# Altium PCB 13-UsbToTTL.PcbDoc
Units mm, origin at the board's own origin, x right, y up, seen from the top; angles counter-clockwise.
Board outline 39.8 x 39.8 mm, 2 copper layers (Top Layer, Bottom Layer); 9 components, 16 nets, 57 pads, 16 vias.
Unrouted connection lines stored in the file: 27.
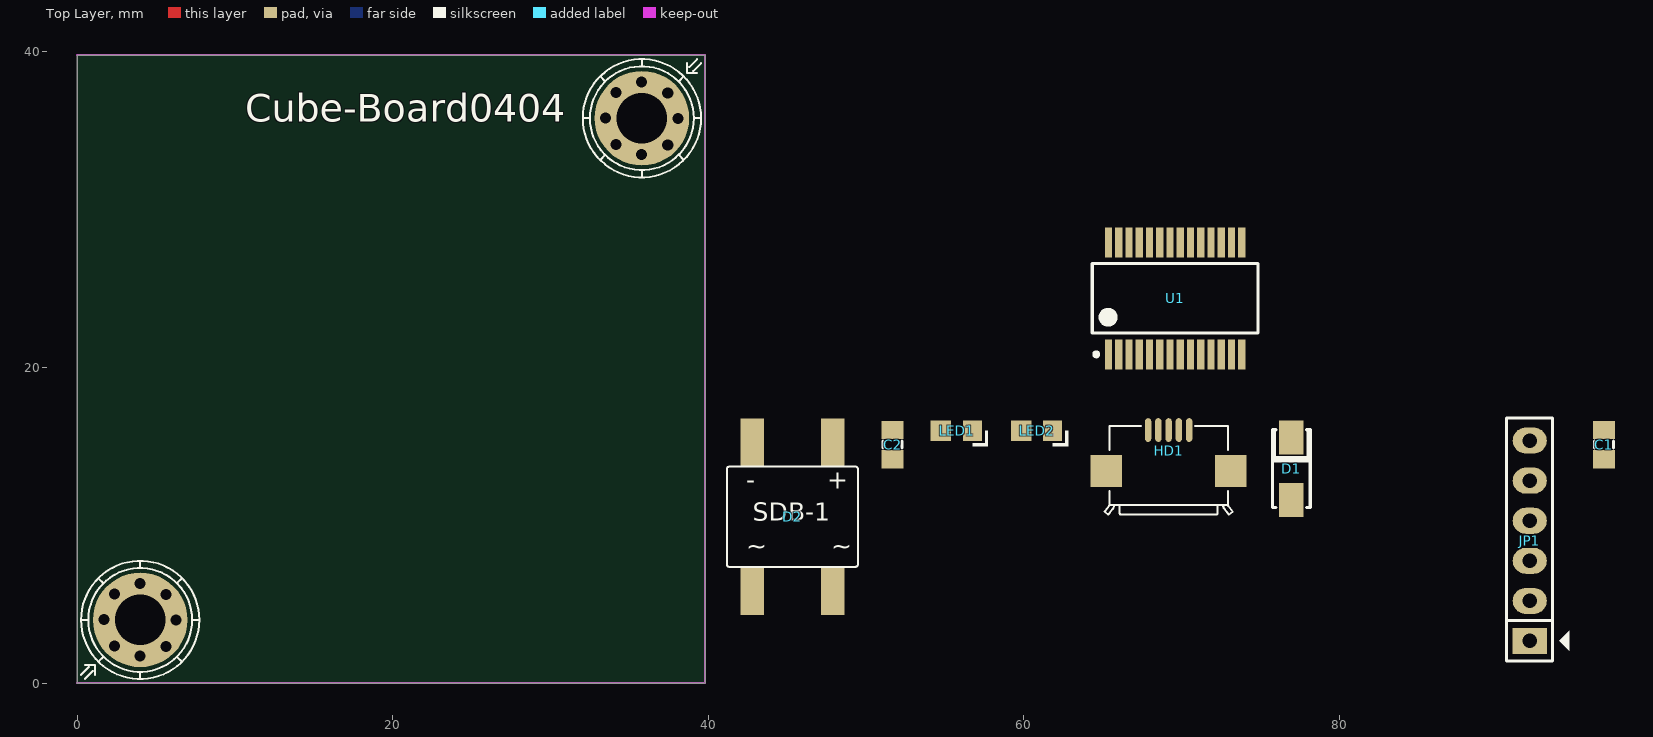
[diagram p0: Top Layer view]
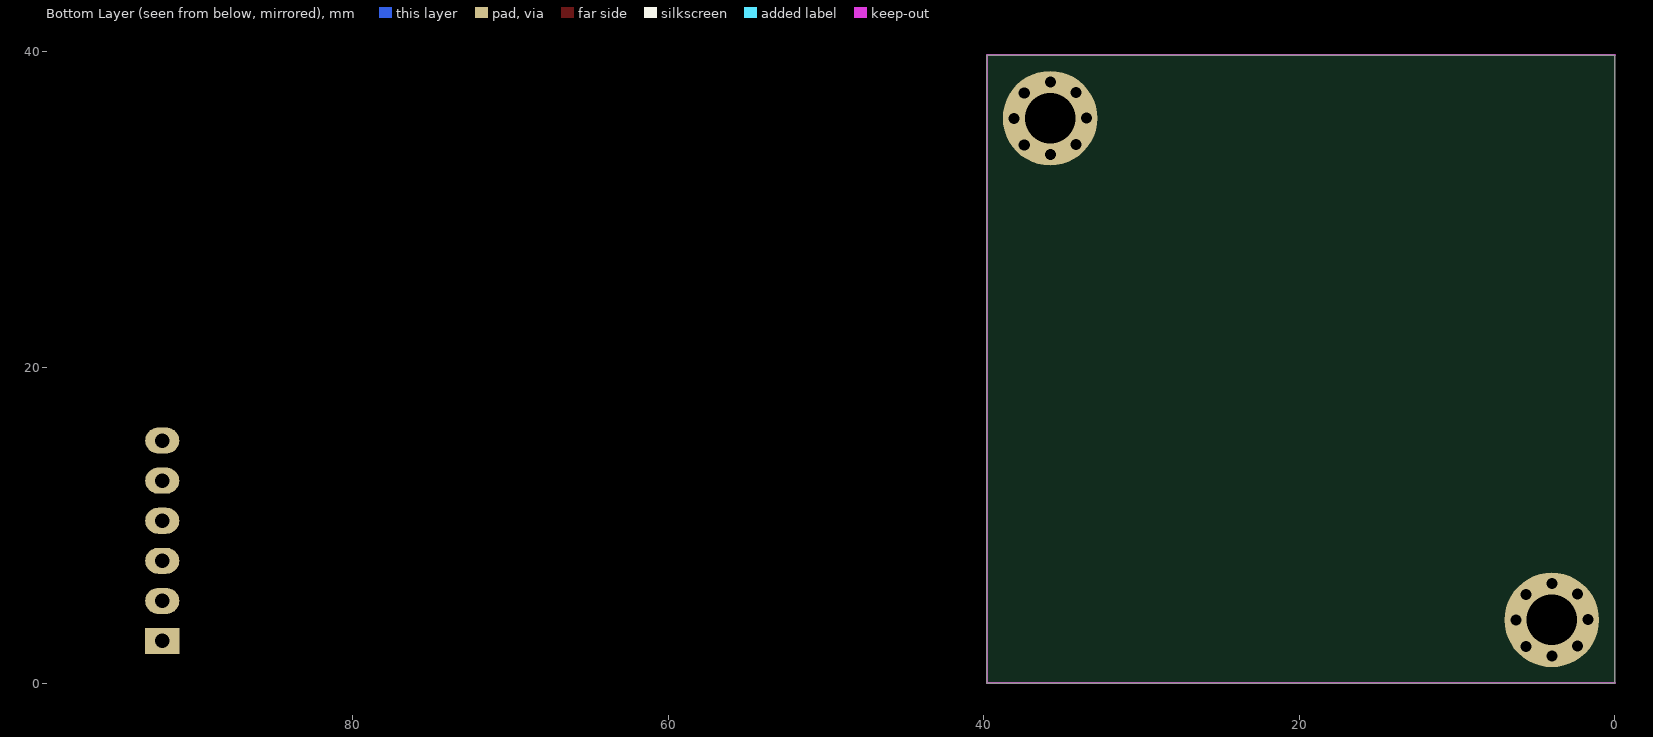
[diagram p1: Bottom Layer view, seen from below]

## Layer stack, top to bottom
Top Solder: solder mask 0.0102, Solder Resist, Dk 3.5
Top Layer: signal copper 0.0356
Dielectric 1: dielectric 0.32, FR-4, Dk 4.8
Bottom Layer: signal copper 0.0356
Bottom Solder: solder mask 0.0102, Solder Resist, Dk 3.5

## Board outline
0,0 0,39.8 39.8,39.8 39.8,0

## Design rules (kind name [scope] priority, off if disabled: settings)
Clearance [All] p1: gap=0.2
PolygonConnect [All] p1: connectstyle=Relief reliefconductorwidth=0.254 reliefentries=4 polygonreliefangle="90 Angle" airgapwidth=0.254
RoutingVias [All] p1: holewidth=0.7 width=1 viastyle="Through Hole" minholewidth=0.7 minwidth=1 maxholewidth=1 maxwidth=2
SolderMaskExpansion [All] p1: expansion=0.102
Width [All] p1: maxlimit=0.254 minlimit=0.254 preferedwidth=0.254
30 further rules are at their usual default settings.

## Components (designator, comment, footprint, x,y, rotation, side; value= is the part's Value field where it differs from the comment)
C1 "100nF" C-0805 96.772,15.111 r90 top
C2 "100nF" C-0805 51.687,15.111 r90 top
D1 "1N4007" D-DO214-AC 76.96,13.587 r90 top
D2 "DB 1A" D-DB-1A-SMD 45.337,10.539 r0 top
HD1 "MiniUSB" USB-MicroUSB-SMD 68.959,13.968 r0 top
JP1 "HEADER 6" JP6 92.073,2.665 r90 top
LED1 "LED" LED-0805 55.751,16 r0 top
LED2 "LED" LED-0805 60.831,16 r0 top
U1 "FT232RL" SSOP-28 69.596,24.384 r90 top

## Footprints (in the part's own frame and the unit in brackets; to place one, negate y for a bottom-side part, rotate by r counter-clockwise, add the part's x,y. Pads: shape width x height; smd on the part's side, far side on the other; paste and mask are expansions set on the pad)
C-0805 [mm] "Chip Capacitor, 2-Leads, Body 2.0x1.3mm, IPC Medium Density"
  rect 1.15x1.4 smd: 1(-0.925,0) 2(0.925,0)
  silkscreen extent -0.22,-0.6 0.23,0.6, body extent -1,-0.63 1,0.63, height 0.5
D-DB-1A-SMD [mm] "DB106S"
  rect 1.5x3 smd: 1(-2.55,-4.713) 2(2.55,-4.713) 3(2.55,4.713) 4(-2.55,4.713)
  silkscreen extent -4.15,-3.18 4.15,3.18, body extent -4.15,-4.95 4.15,4.95, height 3.35
D-DO214-AC [mm] "Molded Diode, 2-Leads, Body 4.3x2.6mm, IPC Medium Density"
  rect 2.15x1.55 smd: 1(-1.979,0) 2(1.979,0)
  silkscreen extent -2.46,-1.25 2.46,1.25, body extent -2.46,-1.2 2.46,1.2, height 2.45
JP6 [mil] "JP6"
  rect 65x85 hole 36: 1(0,0)
  oval 65x85 hole 36: 2(100,0) 3(200,0) 4(300,0) 5(400,0) 6(500,0)
  silkscreen extent -50,-99 556,58, body extent -48,-50 548,48, height 323
LED-0805 [mm]
  rect 1.3x1.3 smd: 1(-1,0)
  rect 1.2x1.3 smd: 2(1,0)
  silkscreen extent 1,-1 2,0, body extent -1.01,-0.63 1.01,0.62, height 1.1
SSOP-28 [mm] "SOP, 28-Leads, Body 10.5x5.6mm (max), Pitch 0.65mm, IPC Medium Density"
  rect 1.9x0.45 smd: 1(-3.55,4.225) 2(-3.55,3.575) 3(-3.55,2.925) 4(-3.55,2.275) 5(-3.55,1.625) 6(-3.55,0.975) 7(-3.55,0.325) 8(-3.55,-0.325) 9(-3.55,-0.975) 10(-3.55,-1.625) 11(-3.55,-2.275) 12(-3.55,-2.925) 13(-3.55,-3.575) 14(-3.55,-4.225) 15(3.55,-4.225) 16(3.55,-3.575) 17(3.55,-2.925) 18(3.55,-2.275) 19(3.55,-1.625) 20(3.55,-0.975) 21(3.55,-0.325) 22(3.55,0.325) 23(3.55,0.975) 24(3.55,1.625) 25(3.55,2.275) 26(3.55,2.925) 27(3.55,3.575) 28(3.55,4.225)
  silkscreen extent -3.67,-5.25 2.2,5.25, body extent -3.91,-5.1 3.91,5.1, height 2
USB-MicroUSB-SMD [mm]
  oval 0.4x1.5 smd: 1(-1.075,2.067) 2(-0.425,2.067) 3(0.225,2.067) 4(0.875,2.067) 5(1.525,2.067)
  rect 2x2 smd: HM1(-3.725,-0.529) HM2(4.175,-0.529)
  silkscreen extent -3.84,-3.3 4.29,2.32, body extent -4.18,-3.29 4.62,2.33, height 2.81

## Part data
C1 C2: library part Ceramic
D1: library part Diode
D2: library part DB
HD1: library part MicroUsB
JP1: library part JP6, "JP6 PIN"
LED1 LED2: library part "LED SMD"

## Free pads (board coordinates)
  round 6 hole 3.2: GND2(4,4) VCC2(35.8,35.8)

## Via types
v1: diameter 1, hole 0.7, Top Layer to Bottom Layer, 16 vias

## Nets (pads, with @x,y where several pads share a name; then routed paths per layer and width w, separated by ;. In a path a pad name is that pad's centre, name@x,y a point inside that pad or via, vN(x,y) a via of type N, cw(c..) or ccw(c..) an arc to the next point about the centre after c; other vN are vias at no path point)
+5V: C1.2 D1.2 JP1.1 LED1.1 LED2.1 U1.4 U1.20
CTS#: JP1.5 U1.11
GND: C1.1 C2.1 D2.4 HD1.5 HD1.HM1 HD1.HM2 JP1.6 U1.7 U1.18 U1.21 U1.25 U1.26
GND1: D2.1 pad.GND2
  other v1: 3.988,1.703 5.639,2.312 2.362,2.338 6.274,3.989 1.702,4.014 5.639,5.614 2.362,5.64 3.988,6.3
NetC2_2: C2.2 U1.17
NetD1_1: D1.1 HD1.1
NetHD1_2: HD1.2 U1.16
NetHD1_3: HD1.3 U1.15
NetLED1_2: LED1.2
NetLED2_2: LED2.2
NetR1_1: U1.23
NetR2_1: U1.22
RTS#: JP1.4 U1.3
RXD: JP1.2 U1.5
TXD: JP1.3 U1.1
VCC1: D2.2 pad.VCC2
  other v1: 35.788,33.489 37.439,34.099 34.162,34.124 38.074,35.775 33.502,35.801 37.439,37.401 34.162,37.426 35.788,38.087
pads on no net: D2.3 HD1.4 U1.2 U1.6 U1.8 U1.9 U1.10 U1.12 U1.13 U1.14 U1.19 U1.24 U1.27 U1.28

## Keep-outs
Keep-Out Layer:
  lines w0.127: 0,0 39.8,0 39.8,39.8 0,39.8

## Silkscreen, mask and mechanical layers (free items; w line width, h text height)
Top Overlay:
  circle w0.127: c35.8,35.8 r3.291
  circle w0.127: c35.8,35.8 r3.747
  circle w0.127: c4,4 r3.291
  circle w0.127: c4,4 r3.747
  lines w0.127: 0.244,0.508 0.752,1.016 ; 0.253,4 0.709,4 ; 0.498,0.254 1.006,0.762 ; 0.498,1.143 1.133,1.143 1.133,0.508 ; 1.35,1.35 1.673,1.673 ; 1.35,6.65 1.673,6.327 ; 4,0.253 4,0.709 ; 6.327,1.673 6.65,1.35 ; 6.327,6.327 6.65,6.65 ; 7.291,4 7.747,4 ; 32.053,35.8 32.509,35.8 ; 33.15,33.15 33.473,33.473 ; 33.15,38.45 33.473,38.127 ; 35.8,39.091 35.8,39.547 ; 38.127,33.473 38.45,33.15 ; 38.127,38.127 38.45,38.45 ; 38.667,39.292 38.667,38.657 39.302,38.657 ; 38.794,39.038 39.302,39.546 ; 39.048,38.784 39.556,39.292 ; 39.091,35.8 39.547,35.8 ; 4,7.291 4,7.747 ; 4,7.291 4,7.747 ; 4,7.291 4,7.747 ; 35.8,32.053 35.8,32.509 ; 35.8,32.053 35.8,32.509 ; 35.8,32.053 35.8,32.509
  text "Cube-Board0404" at 10.668,35 h3
Bottom Solder:
  lines w0.127: 0,0 0,39.8
Mechanical 1:
  circle w0.003: c35.8,35.787 r3
  circle w0.003: c35.8,35.8 r1.6
  circle w0.003: c4,4 r3
  circle w0.003: c4,4 r1.6
  lines w0.127: 0,0 0,39.8

## Text inside footprints (layer, text, board x,y; h text height)
D2: Top Overlay "~        ~" at 42.416,7.745 h2; Top Overlay "-         +" at 42.416,11.936 h2; Top Overlay "SDB-1" at 42.83,9.9 h2